# Altium PCB V1.0.PcbDoc
Units mm, origin at the board's own origin, x right, y up, seen from the top; angles counter-clockwise.
Board outline 45 x 45 mm, 2 copper layers (Top, Bottom); 42 components, 31 nets, 99 pads, 45 vias.
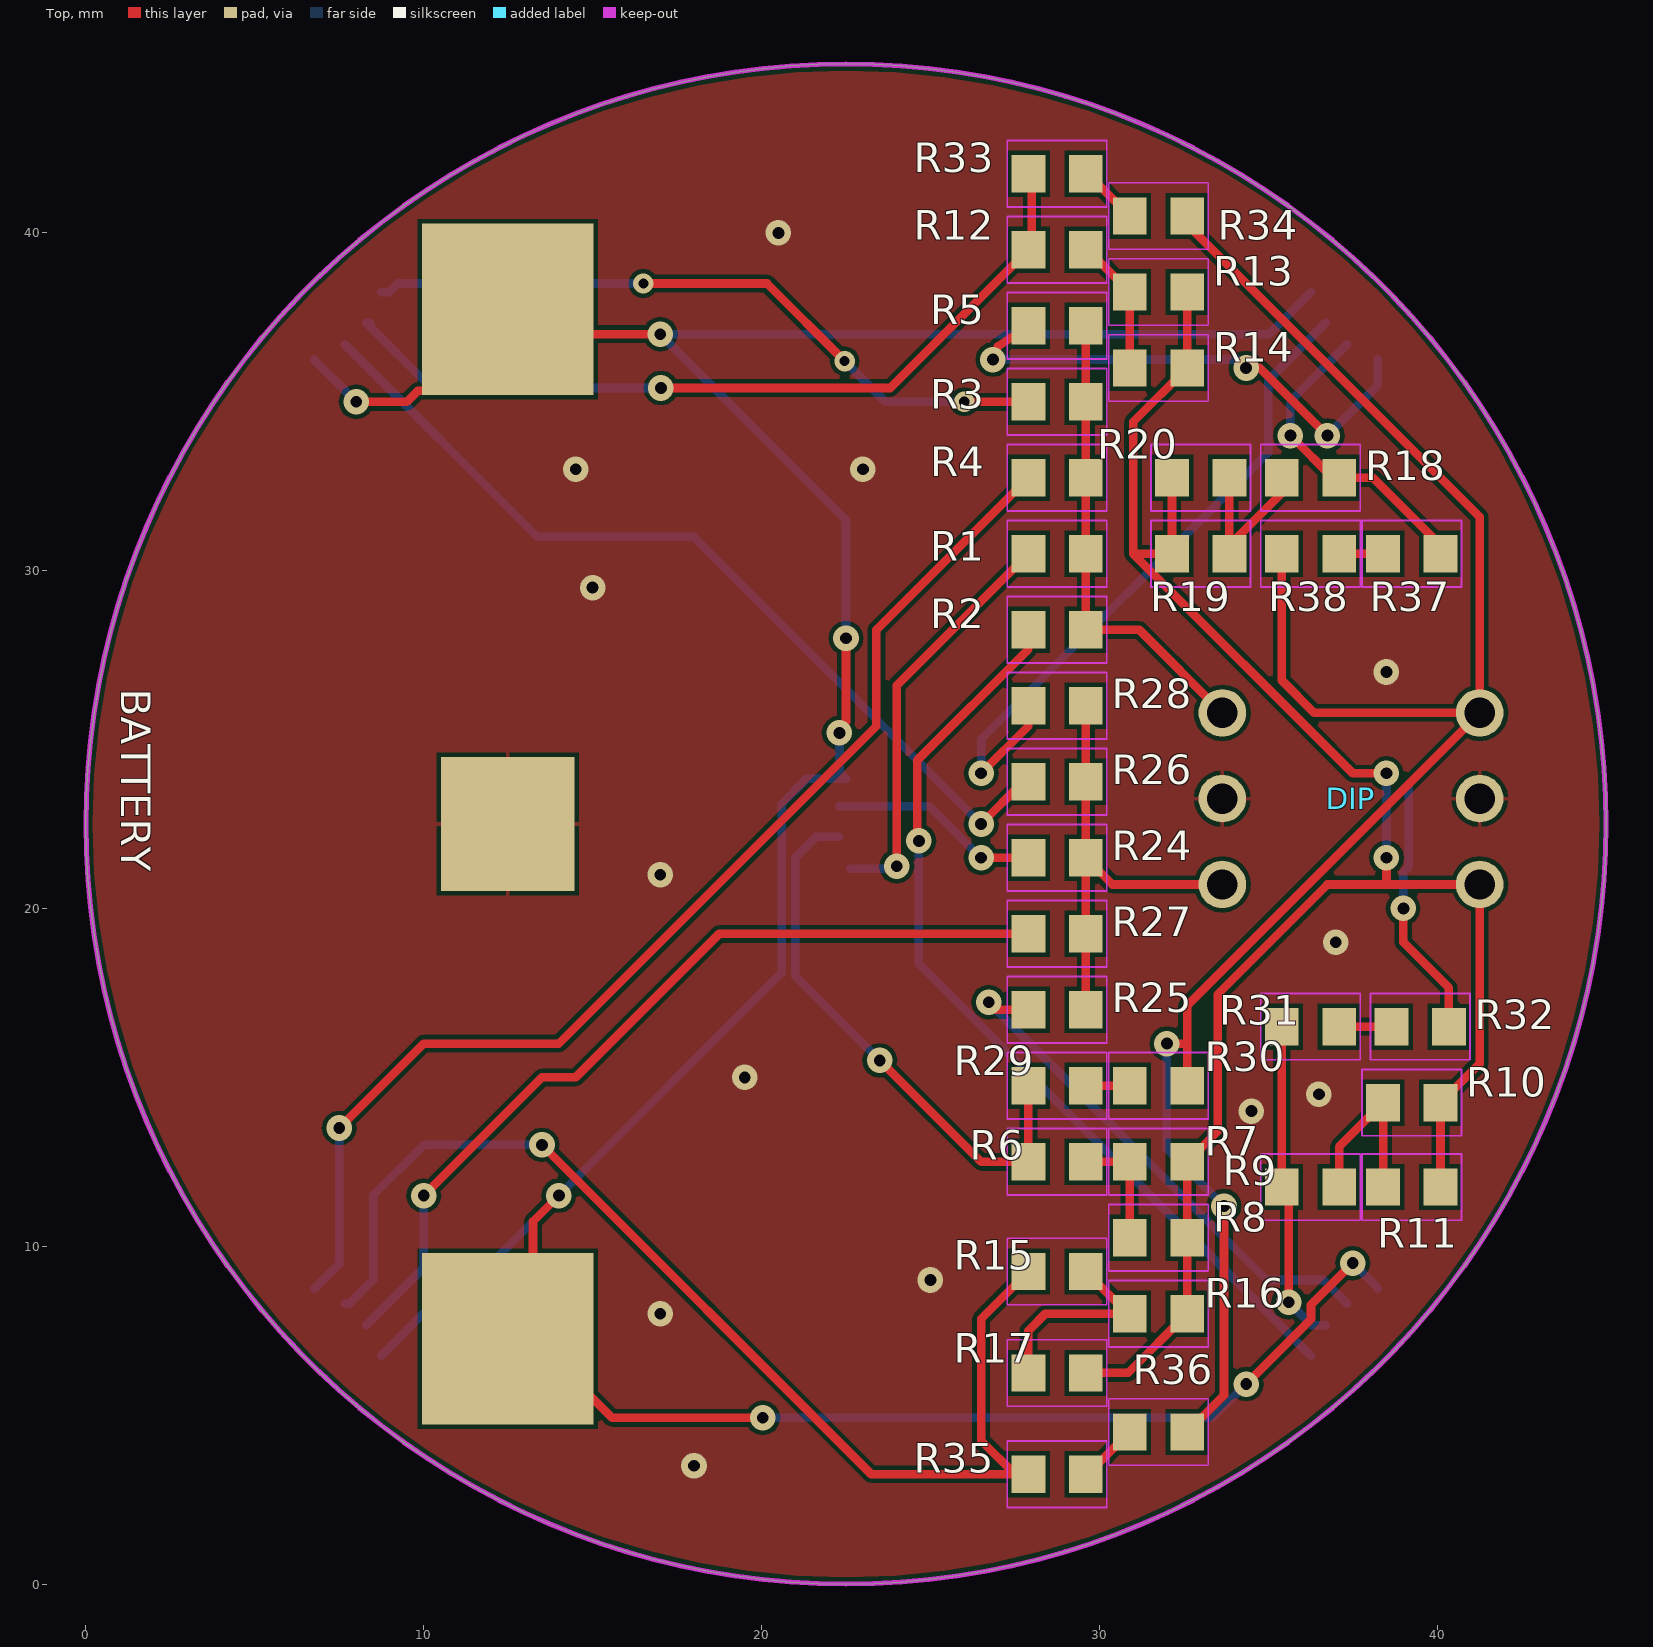
[diagram p0: Top view]
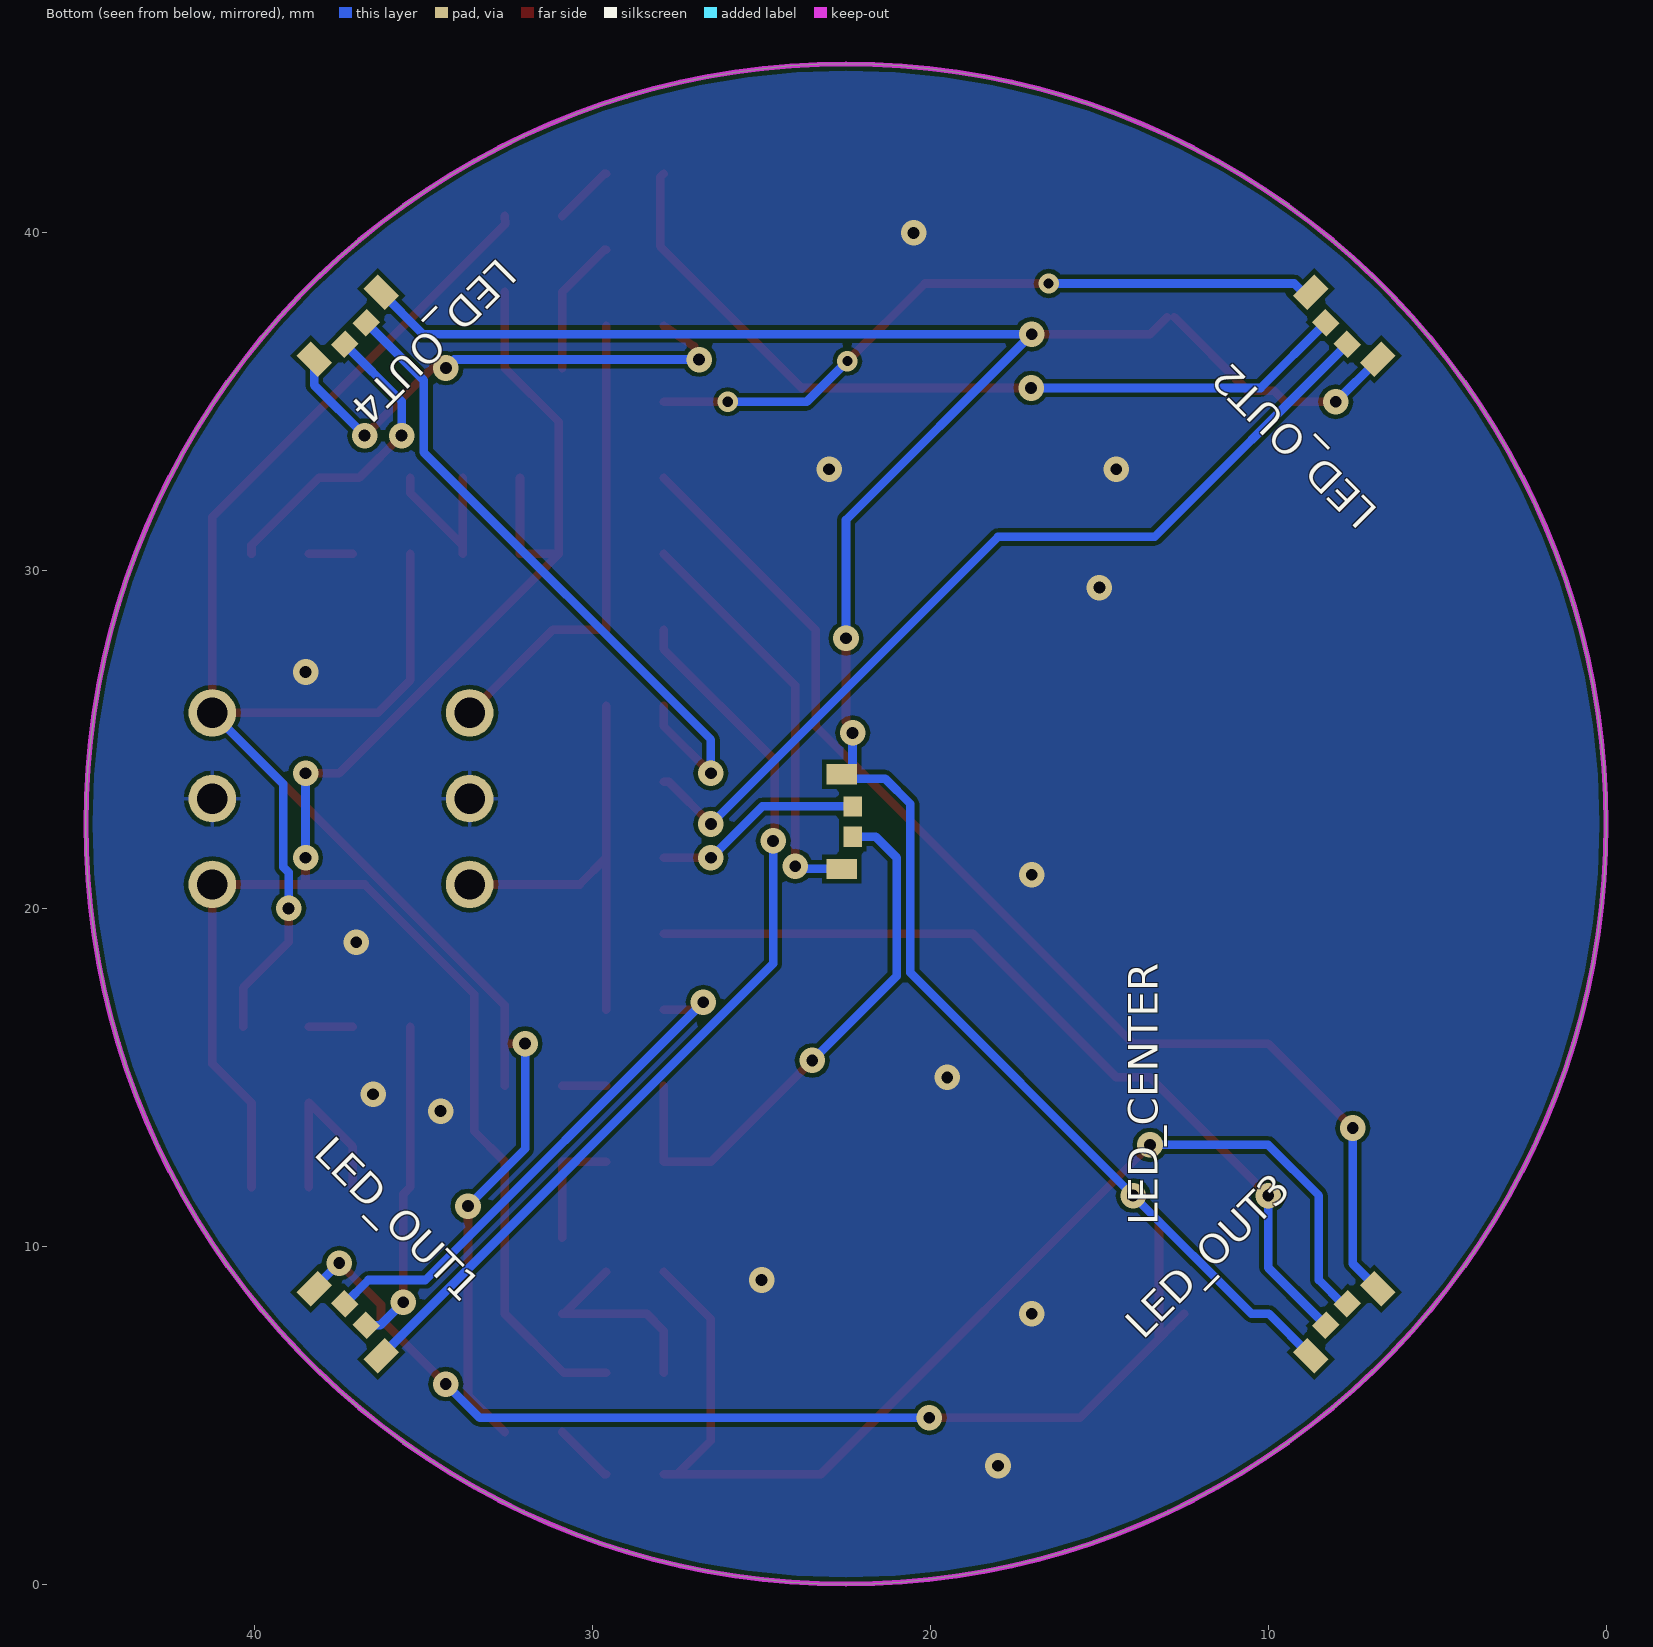
[diagram p1: Bottom view, seen from below]

## Layer stack, top to bottom
Top Solder: solder mask 0.0102, Solder Resist, Dk 3.5
Top: signal copper 0.035
Dielectric 1: dielectric 0.32, FR-4, Dk 4.8
Bottom: signal copper 0.035
Bottom Solder: solder mask 0.0102, Solder Resist, Dk 3.5

## Board outline
22.5,0 ccw(c22.5,22.5) 45,22.5 ccw(c22.5,22.5) 22.5,45 ccw(c22.5,22.5) 0,22.5 ccw(c22.5,22.5)

## Design rules (kind name [scope] priority, off if disabled: settings)
BoardOutlineClearance [All] p1: gap=0.2 ignorepadtopadclearanceinfootprint=FALSE
Clearance [All] p1: gap=0.127 ignorepadtopadclearanceinfootprint=FALSE except(0.25: Arc-Hole Track-Hole SMDPad-Hole THPad-Hole Via-Hole Fill-Hole Poly-Hole Region-Hole Text-Hole)
ComponentClearance [All] p1: gap=0.127 collisioncheckmode=3 verticalgap=0.127 showdistances=TRUE
DiffPairsRouting [All] p1: maxlimit=0.254 minlimit=0.127 mostfreqgap=0.127 toplayer_minwidth=0.127 toplayer_maxwidth=25.4 toplayer_prefwidth=0.127 bottomlayer_minwidth=0.127 bottomlayer_maxwidth=25.4 bottomlayer_prefwidth=0.127 maxuncoupledlength=12.7
Height [All] p1: minheight=0 maxheight=1816.048 prefheight=12.7
HoleSize [All] p1: absolutevalues=TRUE maxlimit=6.3 minlimit=0.3 maxpercent=80.000 minpercent=20.000
HoleToHoleClearance [All] p1: gap=0.25 allowstackedmicrovias=FALSE
MinimumAnnularRing [All] p1: minimumring=0.076
MinimumSolderMaskSliver [All] p1: minsoldermaskwidth=0
PlaneClearance [All] p1: clearance=0.127
PlaneConnect PlaneConnectPowerPads [InPadClass('PowerPads')] p1: planeconnectstyle=Direct reliefexpansion=0.508 reliefentries=4 reliefconductorwidth=0.254 reliefairgap=0.254
PlaneConnect [All] p2: pad.planeconnectstyle=Relief pad.reliefexpansion=0.3 pad.reliefentries=4 pad.reliefconductorwidth=0.127 pad.reliefairgap=0.127 via.planeconnectstyle=Direct via.reliefexpansion=0.3 via.reliefentries=4 via.reliefconductorwidth=0.127 via.reliefairgap=0.127
PolygonConnect PolygonConnectPowerPads [All vs (InPadClass('PowerPads'))] p1: connectstyle=Direct reliefconductorwidth=0.254 reliefentries=4 polygonreliefangle="90 Angle" airgapwidth=0.254
PolygonConnect [All] p2: thpad.connectstyle=Relief thpad.reliefconductorwidth=0.127 thpad.reliefentries=4 thpad.polygonreliefangle="90 Angle" thpad.airgapwidth=0.127 smdpad.connectstyle=Relief smdpad.reliefconductorwidth=0.127 smdpad.reliefentries=4 smdpad.polygonreliefangle="90 Angle" smdpad.airgapwidth=0.127 via.connectstyle=Direct via.reliefconductorwidth=0.127 via.reliefentries=4 via.polygonreliefangle="90 Angle" via.airgapwidth=0.127
RoutingVias [All] p1: holewidth=0.3 width=0.6 viastyle="Through Hole" minholewidth=0.3 minwidth=0.6 maxholewidth=0.6 maxwidth=6.6
SilkToSilkClearance [All] p1: silktosilkclearance=0
SilkToSolderMaskClearance [IsPad] p1: minsilkscreentomaskgap=0.127 clearancetoexposedcopper=TRUE
SolderMaskExpansion [All] p1: expansion=0.075 istentingtop=FALSE
Width [All] p1: maxlimit=25.4 minlimit=0.127 preferedwidth=0.127 minimp=50.000000 maximp=50.000000 favimp=50.000000
20 further rules are at their usual default settings.

## Classes and differential pairs
polygon class PolygonThermal_ON_Width60000_Gap100000: Polygon_1_Net_GND Polygon_2_Net_GND

## Components (designator, comment, footprint, x,y, rotation, side; value= is the part's Value field where it differs from the comment)
BATTERY "3008" 3008 14,22.5 r90 top
DIP "221ADC10" 221ADC10 33.64,25.79 r0 top
LED_CENTER "155124M173200" 155124M173200 22.63,22.57 r270 bottom
LED_OUT1 "155124M173200" 155124M173200 37.25,7.75 r225 bottom
LED_OUT2 "155124M173200" 155124M173200 7.75,37.25 r45 bottom
LED_OUT3 "155124M173200" 155124M173200 7.75,7.75 r135 bottom
LED_OUT4 "155124M173200" 155124M173200 37.25,37.25 r315 bottom
R1 "150" R0603 28.75,30.5 r0 top
R2 "150" R0603 28.75,28.25 r0 top
R3 "150" R0603 28.75,35 r0 top
R4 "150" R0603 28.75,32.75 r0 top
R5 "150" R0603 28.75,37.25 r0 top
R6 "150" R0603 28.75,12.5 r0 top
R7 "150" R0603 31.75,12.5 r0 top
R8 "150" R0603 31.75,10.25 r0 top
R9 "150" R0603 36.25,11.75 r0 top
R10 "150" R0603 39.25,14.25 r0 top
R11 "150" R0603 39.25,11.75 r0 top
R12 "150" R0603 28.75,39.5 r0 top
R13 "150" R0603 31.75,38.25 r0 top
R14 "150" R0603 31.75,36 r0 top
R15 "150" R0603 28.75,9.25 r0 top
R16 "150" R0603 31.75,8 r0 top
R17 "150" R0603 28.75,6.25 r0 top
R18 "150" R0603 36.25,32.75 r180 top
R19 "150" R0603 33,30.5 r180 top
R20 "150" R0603 33,32.75 r180 top
R24 "470" R0603 28.75,21.5 r0 top
R25 "470" R0603 28.75,17 r0 top
R26 "470" R0603 28.75,23.75 r0 top
R27 "470" R0603 28.75,19.25 r0 top
R28 "470" R0603 28.75,26 r0 top
R29 "470" R0603 28.75,14.75 r0 top
R30 "470" R0603 31.75,14.75 r0 top
R31 "470" R0603 36.25,16.5 r0 top
R32 "470" R0603 39.5,16.5 r0 top
R33 "470" R0603 28.75,41.75 r0 top
R34 "470" R0603 31.75,40.5 r0 top
R35 "470" R0603 28.75,3.25 r0 top
R36 "470" R0603 31.75,4.5 r0 top
R37 "470" R0603 39.25,30.5 r180 top
R38 "470" R0603 36.25,30.5 r180 top

## Footprints (in the part's own frame and the unit in brackets; to place one, negate y for a bottom-side part, rotate by r counter-clockwise, add the part's x,y. Pads: shape width x height; smd on the part's side, far side on the other; paste and mask are expansions set on the pad)
221ADC10 [mm] "221ADC10"
  round 1.408 hole 0.9: 1(0,0) 2(7.62,-5.08) 4(0,-5.08) 8(7.62,0) C1(0,-2.54) C2(7.62,-2.54)
  body extent -2.65,-8.55 9.69,3.47, height 3.81
3008 [mm] "3008"
  rect 5.08x5.08 smd: 1(-15.24,1.515) 2(15.24,1.515)
  rect 3.96x3.96 smd: 3(0,1.515)
  body extent -18.83,-12.36 18.83,12.36, height 3.81
155124M173200 [mm] "155124M173200"
  rect 0.6x0.9 smd: 1(-1.4,0) 4(1.4,0)
  rect 0.6x0.55 smd: 2(-0.45,0.325) 3(0.45,0.325)
  body extent -1.7,-0.45 1.7,0.6, height 1.27
R0603 [mm] "R0603"
  rect 1x1.1 smd: 1(-0.85,0) 2(0.85,0)
  Top keep-out lines w0.051: -1.473,-0.983 -1.473,0.983 1.473,0.983 1.473,-0.983 -1.473,-0.983
  body extent -1.5,-1.01 1.5,1.01, height 3.81

## Part data
BATTERY: "BATTERY SOCKET   Source:  Datasheet", MANUFACTURER_NAME="Keystone Electronics", ARROW_PART_NUMBER=3008, ARROW_PRICE-STOCK=https://www.arrow.com/en/products/3008/keystone-electronics, DeviceSetName=3008, GateName_1=G$1, HEIGHT=5mm, LibraryName=SamacSys_Parts, MANUFACTURER_PART_NUMBER=3008, MOUSER_PART_NUMBER=534-3008, MOUSER_PRICE-STOCK=https://www.mouser.co.uk/ProductDetail/Keystone-Electronics/3008?qs=Mn60vILZNNaVxpUY7xQk0w%3D%3D, SymbolName_1=3008
DIP: "SWITCH ROTARY DIP BCD 100MA 50V   Source:  Datasheet", MANUFACTURER_NAME=CTS, DeviceSetName=221ADC10, GateName_1=G$1, HEIGHT=12.06mm, LibraryName=SamacSys_Parts, MANUFACTURER_PART_NUMBER=221ADC10, RS_PART_NUMBER=1234573, RS_PRICE-STOCK=http://uk.rs-online.com/web/p/products/1234573, SymbolName_1=221ADC10
LED_CENTER LED_OUT1 LED_OUT2 LED_OUT3 LED_OUT4: "WURTH ELEKTRONIK - 155124M173200 - LED, RED/GRN/BLUE, 450/850/140MCD, 1204   Source:  Datasheet", MANUFACTURER_NAME="Wurth Elektronik", ARROW_PART_NUMBER=ARROW_PART_NUMBER, ARROW_PRICE-STOCK=ARROW_PRICE-STOCK, DeviceSetName=155124M173200, GateName_1=G$1, HEIGHT=mm, LibraryName=SamacSys_Parts, MANUFACTURER_PART_NUMBER=155124M173200, MOUSER_PART_NUMBER=710-155124M173200, MOUSER_PRICE-STOCK=https://www.mouser.co.uk/ProductDetail/Wurth-Elektronik/155124M173200?qs=5aG0NVq1C4xPhoUU07x4gQ%3D%3D, SymbolName_1=155124M173200
R1 R2 R3 R4 R5 R6 R7 R8 R9 R10 R11 R12 R13 R14 R15 R16 R17 R18 R19 R20 R24 R25 R26 R27 R28 R29 R30 R31 R32 R33 R34 R35 R36 R37 R38: library part R-EU_R0603, "RESISTOR, European symbol", DeviceName=R0603, DeviceSetName=R-EU_, GateName_1=G$1, LibraryName=rcl, POPULARITY=70, SPICEPREFIX=R, SymbolName_1=R-EU

## Via types
v1: diameter 0.756/0.756 (per signal layer), hole 0.35, Top to Bottom, 42 vias
v2: diameter 0.6, hole 0.3, Top to Bottom, 3 vias

## Nets (pads, with @x,y where several pads share a name; then routed paths per layer and width w, separated by ;. In a path a pad name is that pad's centre, name@x,y a point inside that pad or via, vN(x,y) a via of type N, cw(c..) or ccw(c..) an arc to the next point about the centre after c; other vN are vias at no path point)
D_BLUE: DIP.4 R24.2 R25.2 R26.2 R27.2 R28.2 | length 13.4
  Top w0.254: R25.2 R27.2 R24.2 ; R28.2 R26.2 R24.2 ; DIP.4 30.39,20.71 R24.2
D_GREEN: DIP.2 R7.2 R8.2 R10.2 R11.2 R13.2 R14.2 R16.2 R17.2 R19.2 R20.2 | length 57.4
  Top w0.254: R17.2 30.85,6.25 R16.2 R8.2 R7.2 33.5,13.4 33.5,17.455 36.755,20.71 38.5,20.71 ; R20.2 R19.2 31,30.5 ; R13.2 R14.2 31,34.4 31,30.5 ; v1(38.5,21.5) 38.5,20.71 ; v1(38.5,24) 37.5,24 31,30.5 ; R11.2 R10.2 41.26,15.41 DIP.2 38.5,20.71
  Bottom w0.254: v1(38.5,21.5) v1(38.5,24)
D_ORANGE: DIP.8 R30.2 R32.2 R34.2 R36.2 R38.2 | length 67
  Top w0.254: v1(32,16) 32.6,16 ; R36.2 33.69,5.59 v1(33.69,11.19) ; R30.2 32.6,16 ; R34.2 32.583,40.267 41.26,31.59 DIP.8 ; R38.2 35.4,26.755 36.365,25.79 DIP.8 ; v1(39,20) 39,19 40.35,17.65 R32.2 ; 32.6,16 32.6,17.13 DIP.8
  Bottom w0.254: v1(32,16) 32,12.88 v1(33.69,11.19) ; v1(39,20) 39,21.07 39.158,21.228 39.158,23.688 DIP.8
D_RED: DIP.1 R1.2 R2.2 R3.2 R4.2 R5.2 | length 14.1
  Top w0.254: R5.2 R3.2 R4.2 R1.2 R2.2 31.18,28.25 DIP.1
GND: BATTERY.3 DIP.C1 DIP.C2
  other v1: 18,3.5 17,8 25,9 34.5,14 36.5,14.5 19.5,15 37,19 17,21 38.5,27 15,29.5 14.5,33 23,33 20.5,40
L1_BLUE: LED_CENTER.2 R24.1 | length 6.2
  Top w0.254: v1(26.5,21.5) R24.1
  Bottom w0.254: LED_CENTER.2 24.98,23.02 v1(26.5,21.5)
L1_GREEN: LED_CENTER.3 R6.1 R29.1 | length 16.5
  Top w0.254: v1(23.5,15.5) 26.5,12.5 R6.1 R29.1
  Bottom w0.254: LED_CENTER.3 21.62,22.12 21,21.5 21,18 v1(23.5,15.5)
L1_RED: LED_CENTER.4 R1.1 | length 12.3
  Top w0.254: v1(24,21.25) 24,26.6 R1.1
  Bottom w0.254: LED_CENTER.4 23.92,21.17 v1(24,21.25)
LO1_BLUE: LED_OUT1.2 R25.1 | length 15.6
  Top w0.254: v1(26.725,17.225) 26.95,17 R25.1
  Bottom w0.254: v1(26.725,17.225) 34.95,9 36.636,9 LED_OUT1.2
LO1_GREEN: LED_OUT1.3 R9.1 R31.1 | length 9.6
  Top w0.254: R31.1 R9.1 35.608,11.542 v1(35.608,8.342)
  Bottom w0.254: v1(35.608,8.342) 36.288,7.662 LED_OUT1.3
LO1_RED: LED_OUT1.4 R2.1 | length 27.7
  Top w0.254: v1(24.658,22) 24.612,22.045 24.612,24.388 27.9,27.675 R2.1
  Bottom w0.254: v1(24.658,22) 24.658,18.363 LED_OUT1.4@36.26,6.76
LO2_BLUE: LED_OUT2.2 R26.1 | length 26.6
  Top w0.254: v1(26.5,22.5) 27.75,23.75 R26.1
  Bottom w0.254: LED_OUT2.2 13.364,31 18,31 v1(26.5,22.5)
LO2_GREEN: LED_OUT2.3 R12.1 R33.1 | length 24.6
  Top w0.254: v1(17.022,35.408) 23.808,35.408 28,39.6 28,41.65 R33.1
  Bottom w0.254: LED_OUT2.3@8.42,37.339 LED_OUT2.3 10.229,35.408 v1(17.022,35.408)
LO2_RED: LED_OUT2.4 R3.1 | length 20.7
  Top w0.254: v2(16.5,38.5) 20.162,38.5 v2(22.46,36.202) ; v2(26,35) R3.1
  Bottom w0.254: LED_OUT2.4 8.973,38.24 9.233,38.5 v2(16.5,38.5) ; v2(22.46,36.202) 23.662,35 v2(26,35)
LO3_BLUE: LED_OUT3.2 R27.1 | length 25.7
  Top w0.254: v1(10,11.5) 13.5,15 14.5,15 18.75,19.25 R27.1
  Bottom w0.254: LED_OUT3.2 10,9.363 v1(10,11.5)
LO3_GREEN: LED_OUT3.3 R15.1 R35.1 | length 34.7
  Top w0.254: v1(13.5,13) 23.25,3.25 R35.1@27.5,3.25 ; R35.1 R35.1@27.5,3.25 ; R15.1 26.5,7.85 26.5,4.25 R35.1@27.5,3.25
  Bottom w0.254: LED_OUT3.3 7.798,8.298 8.5,9 8.5,11.5 10,13 v1(13.5,13)
LO3_RED: LED_OUT3.4 R4.1 | length 35.1
  Top w0.254: v1(7.5,13.5) 10,16 14,16 23.4,25.4 23.4,28.25 R4.1
  Bottom w0.254: LED_OUT3.4@6.76,8.74 7.5,9.48 v1(7.5,13.5)
LO4_BLUE: LED_OUT4.2 R28.1 | length 20.1
  Top w0.254: v1(26.5,24) 27.9,25.4 R28.1
  Bottom w0.254: v1(26.5,24) 26.5,25 35,33.5 35,35.636 LED_OUT4.2
LO4_GREEN: LED_OUT4.3 R18.1 R37.1 | length 9.4
  Top w0.254: v1(35.658,34) 36.908,32.75 R18.1 38.1,32.75 40.1,30.75 R37.1
  Bottom w0.254: v1(35.658,34) 35.658,35.021 LED_OUT4.3
LO4_RED: LED_OUT4.4 R5.1 | length 15.2
  Top w0.254: v1(26.85,36.25) 27,36.635 R5.1 ; v1(34.343,36) 34.75,36 v1(36.75,34)
  Bottom w0.254: v1(26.85,36.25) 34.092,36.25 v1(34.343,36) ; v1(36.75,34) 38.24,35.49 LED_OUT4.4
NetR6_2: R6.2 R7.1 R8.1 | length 3.5
  Top w0.254: R6.2 R7.1 R8.1
NetR9_2: R9.2 R10.1 R11.1 | length 5.5
  Top w0.254: R9.2 37.1,12.95 R10.1 R11.1
NetR12_2: R12.2 R13.1 R14.1 | length 4.1
  Top w0.254: R12.2 29.65,39.5 R13.1 R14.1
NetR15_2: R15.2 R16.1 R17.1 | length 6.3
  Top w0.254: R17.1 27.9,7.5 28.4,8 R16.1 30.85,8 R15.2
NetR18_2: R18.2 R19.1 R20.1 | length 5.1
  Top w0.254: R20.1 R19.1 33.85,30.75 35.4,32.3 R18.2
NetR29_2: R29.2 R30.1 | length 1.3
  Top w0.254: R29.2 R30.1
NetR31_2: R31.2 R32.1 | length 1.3
  Top w0.254: R31.2 R32.1@38.4,16.5
NetR33_2: R33.2 R34.1 | length 1.8
  Top w0.254: R33.2 29.65,41.75 R34.1
NetR35_2: R35.2 R36.1 | length 1.8
  Top w0.254: R35.2 29.65,3.25 R36.1
NetR37_2: R37.2 R38.1 | length 1.3
  Top w0.254: R38.1 R37.2
VBAT: BATTERY.1 BATTERY.2 LED_CENTER.1 LED_OUT1.1 LED_OUT2.1 LED_OUT3.1 LED_OUT4.1 | length 105
  Top w0.254: v1(8,35) 9.5,35 9.827,35.327 10.606,35.327 BATTERY.2@12.779,37.5 ; BATTERY.1@12.495,8 12.86,7.635 BATTERY.1@13.235,7.26 ; BATTERY.2@12.998,37.503 13.5,37 v1(17,37) ; v1(14,11.5) 13.235,10.735 BATTERY.1@13.235,7.26 ; v1(20.034,4.921) 15.575,4.921 BATTERY.1@13.235,7.26 ; v1(22.303,25.197) 22.303,25.333 22.5,25.53 v1(22.5,28) ; v1(34.348,5.921) 36.265,7.838 36.265,8.265 v1(37.5,9.5)
  Bottom w0.254: LED_OUT2.1@6.76,36.26 6.76,36.24 v1(8,35) ; LED_OUT3.1@8.74,6.76 9.98,8 10.5,8 v1(14,11.5) 20.594,18.094 20.594,23.094 21.34,23.84 22.5,23.84 22.307,24.033 22.307,25.193 v1(22.303,25.197) ; v1(20.034,4.921) 33.348,4.921 v1(34.348,5.921) ; v1(22.5,28) 22.5,31.5 v1(17,37) 35.02,37 LED_OUT4.1 ; v1(37.5,9.5) 38.24,8.76 LED_OUT1.1

## Polygon pours and split planes (outlines as drawn)
GND on Top "Polygon_1_Net_GND" (solid, remove dead copper, pour order 1): 22.5,45.076 cw(c22.5,22.5) 45.076,22.5 cw(c22.5,22.5) 22.5,-0.076 cw(c22.5,22.5) -0.076,22.5 cw(c22.5,22.5)
GND on Top "GND_L01_P002" (solid, pour order 2): 0,47 0.5,46.5 46.5,46.5 49.5,43.5 49.5,0 0,0
GND on Bottom "Polygon_2_Net_GND" (solid, remove dead copper, pour order 0): 22.5,45.076 cw(c22.5,22.5) 45.076,22.5 cw(c22.5,22.5) 22.5,-0.076 cw(c22.5,22.5) -0.076,22.5 cw(c22.5,22.5)
no net on Bottom "NONET_L02_P003" (solid, pour order 3): 0,0 0,51 34.5,51 57,28.5 57,3 54,0

## Keep-outs
Keep-Out Layer:
  the board outline again, w0.152

## Silkscreen, mask and mechanical layers (free items; w line width, h text height)
Dimension:
  circle w0.152: c22.5,22.5 r22.5
tDocu:
  circle w0.152: c12.5,22.5 r12.25
tPlace:
  text "TTLumen" at 17.5,42 h2.76
  text "An idea" at 34.654,25.875 h1.5
  text "born on" at 34.654,24.372 h1.5
  text "an island" at 34.654,22.868 h1.5
  text "becomes" at 34.654,21.365 h1.5
  text "reality" at 34.654,20.238 h1.5
  text "LargeBase_Round_V1.0" at 17.5,1 h0.94
bPlace:
  text "-Debby Boone" at 25,20 h0.94 r270
  text "\"You light up my life\"" at 25.915,20 h0.94 r270